# Altium PCB modulo_temperaturaUmidade.PcbDoc
Units mil, origin at the board's own origin, x right, y up, seen from the top; angles counter-clockwise.
Board outline 6000 x 4000 mil, 2 copper layers (Top Layer, Bottom Layer); 55 components, 34 nets, 205 pads, 0 vias.
Unrouted connection lines stored in the file: 149.
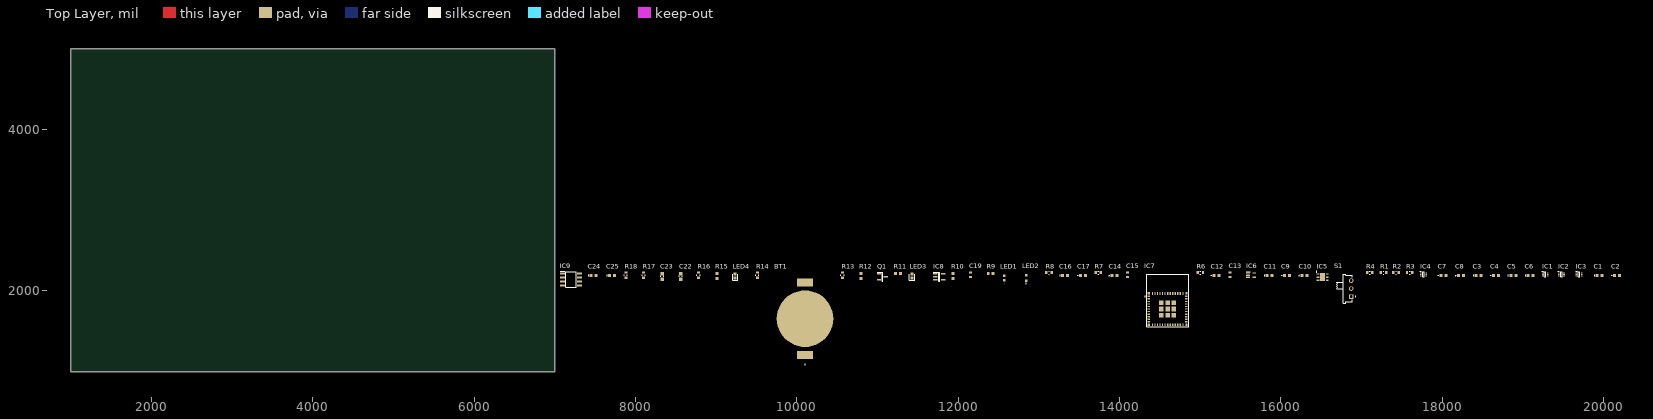
[diagram p0: Top Layer view]
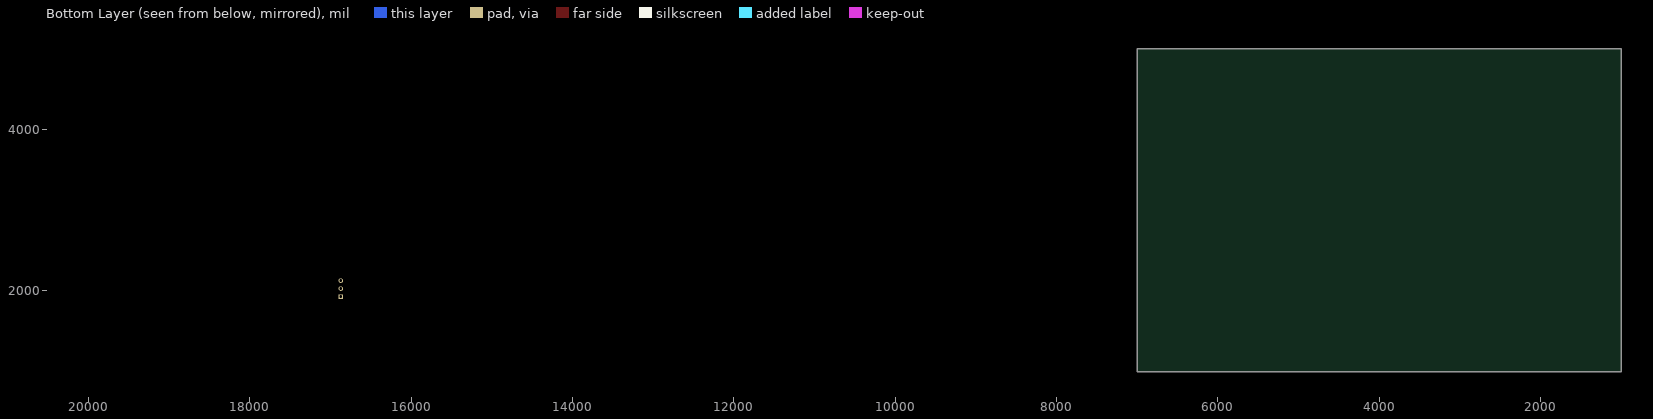
[diagram p1: Bottom Layer view, seen from below]

## Layer stack, top to bottom
Top Solder: solder mask 0.4, Solder Resist, Dk 3.5
Top Layer: signal copper 1.4
Dielectric 1: dielectric 12.6, FR-4, Dk 4.8
Bottom Layer: signal copper 1.4
Bottom Solder: solder mask 0.4, Solder Resist, Dk 3.5

## Board outline
1000,1000 7000,1000 7000,5000 1000,5000

## Design rules (kind name [scope] priority, off if disabled: settings)
Clearance [All] p1: gap=10 ignorepadtopadclearanceinfootprint=FALSE except(0: Arc-Hole Track-Hole SMDPad-Hole THPad-Hole Via-Hole Fill-Hole Poly-Hole Region-Hole Text-Hole)
PolygonConnect [All] p1: connectstyle=Relief reliefconductorwidth=10 reliefentries=4 polygonreliefangle="90 Angle" airgapwidth=10
RoutingVias [All] p1: holewidth=28 width=50 viastyle="Through Hole" minholewidth=28 minwidth=50 maxholewidth=28 maxwidth=50
SolderMaskExpansion [All] p1: expansion=4 istentingtop=FALSE
Width [All] p1: maxlimit=10 minlimit=10 preferedwidth=10
30 further rules are at their usual default settings.

## Components (designator, comment, footprint, x,y, rotation, side; value= is the part's Value field where it differs from the comment)
BT1 "BAT-HLD-001" BATHLD001 10100,1655 r90 top
C1 "C0603C104K4RACTU" C0603 19950,2190 r0 top value=0.1µ
C2 "C0603C103K4RECTU" C0603 20165,2190 r0 top value=0.01µ
C3 "C0603C104K4RACTU" C0603 18450,2190 r0 top value=0.1µ
C4 "C0603C103K4RECTU" C0603 18665,2190 r0 top value=0.01µ
C5 "C0603C104K4RACTU" C0603 18880,2190 r0 top value=0.1µ
C6 "C0603C103K4RECTU" C0603 19095,2190 r0 top value=0.01µ
C7 "C0603C104K4RACTU" C0603 18015,2190 r0 top value=0.1µ
C8 "C0603C103K4RECTU" C0603 18230,2190 r0 top value=0.01µ
C9 "C0603C104K4RACTU" C0603 16075,2190 r0 top value=0.1µ
C10 "C0603C103K4RECTU" C0603 16290,2190 r0 top value=0.01µ
C11 "C0603C103K4RECTU" C0603 15860,2190 r0 top value=0.01µ
C12 "C0603C104K4RACTU" C0603 15200,2190 r0 top value=0.1µ
C13 "CL10B105KO8NNNC" CAPC1608X90N 15365,2200 r90 top value=1µ
C14 "C0603C104K4RACTU" C0603 13935,2190 r0 top value=0.1µ
C15 "CL10B105KO8NNNC" CAPC1608X90N 14100,2200 r90 top value=1µ
C16 "C0603C103K4RECTU" C0603 13325,2190 r0 top value=0.01µ
C17 "C0603C104K4RACTU" C0603 13545,2190 r0 top value=0.1µ
C19 "CL10B105KO8NNNC" CAPC1608X90N 12150,2200 r90 top value=1µ
C22 "CC0603JRNPO9BN250" CAPC1608X90 8560,2180 r90 top value=25p
C23 "CC0603JRNPO9BN250" CAPC1608X90 8330,2180 r90 top value=25p
C24 "C0603C103K4RECTU" C0603 7480,2190 r0 top value=0.01µ
C25 "C0603C104K4RACTU" C0603 7710,2190 r0 top value=0.1µ
IC1 "TMP112AIDRLR" SOTFL50P160X60-6N 19275,2205 r0 top
IC2 "TMP112AIDRLR" SOTFL50P160X60-6N 19475,2205 r0 top
IC3 "TMP112AIDRLR" SOTFL50P160X60-6N 19695,2205 r0 top
IC4 "TMP112AIDRLR" SOTFL50P160X60-6N 17765,2205 r0 top
IC5 "HDC1080DMBR" SON100P300X300X80-7N-D 16515,2170 r0 top
IC6 "TPS71733DCKR" SOT65P210X110-5N 15630,2195 r0 top
IC7 "ESP32-C3-MINI-1-N4" ESP32C3MINI1N4 14595,1775 r0 top
IC8 "MCP73831T-2ACI_OT" SOT95P270X145-5N 11765,2175 r0 top value=MCP73831T-2ACI/OT
IC9 "ST25DV04K-IER6S3" SOIC127P600X175-8N 7200,2140 r0 top
LED1 "LY_L29K-H1K2-26" LYL29KH1K226 12570,2160 r90 top value="LY L29K-H1K2-26"
LED2 "CSL1001BT1C" CSL1001BT1C 12840,2160 r0 top
LED3 "LG_L29K-F2J1-24" LEDC1308X67N 11425,2185 r90 top value="LG L29K-F2J1-24"
LED4 "LS_L29K-G1H2-1" LEDC1308X67N 9235,2185 r90 top value="LS L29K-G1H2-1"
Q1 "SQ2364EES-T1_GE3" SOT95P237X112-3N 11060,2175 r0 top
R1 "RR0816P-512-D" RESC1608X60N 17270,2225 r0 top value=5.1K
R2 "RR0816P-512-D" RESC1608X60N 17425,2225 r0 top value=5.1K
R3 "RR0816P-512-D" RESC1608X60N 17595,2225 r0 top value=5.1K
R4 "RR0816P-512-D" RESC1608X60N 17100,2225 r0 top value=5.1K
R6 "RR0816P-512-D" RESC1608X60N 15000,2225 r0 top value=5.1K
R7 "RR0816P-103-D" RESC1608X60N 13735,2225 r0 top value=10K
R8 "RR0816P-512-D" RESC1608X60N 13125,2225 r0 top value=5.1K
R9 "RR0816P-162-D" RESC1608X50N#1 12400,2215 r0 top value=1.6K
R10 "RR0816P-2490-D-39A" RESC1608X50N#2 11935,2185 r90 top value=249
R11 "RR0816P-8060-D-88A" RESC1608X50N#2 11250,2215 r0 top value=806
R12 "RR0816P-2492-D-39C" RESC1608X50N#2 10795,2185 r90 top value=24.9K
R13 "RR0816P-331-D" RESC1608X60N 10565,2195 r90 top value=330
R14 "RR0816P-103-D" RESC1608X60N 9510,2195 r90 top value=10K
R15 "RR0816P-751-D" RESC1608X50N#2 9010,2185 r90 top value=750
R16 "RR0816P-103-D" RESC1608X60N 8780,2195 r90 top value=10K
R17 "RR0816P-512-D" RESC1608X60N 8100,2195 r90 top value=5.1K
R18 "RR0816P-512-D" RESC1608X60N 7880,2195 r90 top value=5.1K
S1 "SLW-913535-2A-RA-D" SLW9135352ARAD 16870,1930 r90 top

## Footprints (in the part's own frame and the unit in brackets; to place one, negate y for a bottom-side part, rotate by r counter-clockwise, add the part's x,y. Pads: shape width x height; smd on the part's side, far side on the other; paste and mask are expansions set on the pad)
BATHLD001 [mm]
  rect 2.5x5.1 smd: 1(-11.45,0) 2(11.45,0)
  round 17.8 smd: 3(0,0)
  silkscreen extent -14.5,-0.05 -14.4,0.05, body extent -11.43,-7.75 11.43,7.74, height 4.32
C0603 [mm]
  rect 0.95x1 smd: 1(-0.8,0) 2(0.8,0)
  silkscreen extent -1.7,-0.05 -1.6,0.05, body extent -0.87,-0.48 0.88,0.47, height 0.87
CAPC1608X90 [mm]
  rect 1.1x1 smd: 1(-0.85,0) 2(0.85,0)
  silkscreen extent -0.15,-0.45 0.15,0.45, body extent -0.8,-0.4 0.8,0.4, height 0.9
CAPC1608X90N [mm]
  rect 0.73x0.94 smd: 1(-0.71,0) 2(0.71,0)
  body extent -0.8,-0.4 0.8,0.4, height 0.9
CSL1001BT1C [mm]
  rect 0.8x0.8 smd: 1(0,-0.825) 2(0,0.825)
  silkscreen extent -0.05,-1.8 0.05,-1.7, body extent -0.4,-0.8 0.4,0.8, height 1.26
ESP32C3MINI1N4 [mm]
  rect 0.8x0.4 smd: 1(-5.9,4) 2(-5.9,3.2) 3(-5.9,2.4) 4(-5.9,1.6) 5(-5.9,0.8) 6(-5.9,0) 7(-5.9,-0.8) 8(-5.9,-1.6) 9(-5.9,-2.4) 10(-5.9,-3.2) 11(-5.9,-4) 25(5.9,-4) 26(5.9,-3.2) 27(5.9,-2.4) 28(5.9,-1.6) 29(5.9,-0.8) 30(5.9,0) 31(5.9,0.8) 32(5.9,1.6) 33(5.9,2.4) 34(5.9,3.2) 35(5.9,4)
  rect 0.4x0.8 smd: 12(-4.8,-4.9) 13(-4,-4.9) 14(-3.2,-4.9) 15(-2.4,-4.9) 16(-1.6,-4.9) 17(-0.8,-4.9) 18(0,-4.9) 19(0.8,-4.9) 20(1.6,-4.9) 21(2.4,-4.9) 22(3.2,-4.9) 23(4,-4.9) 24(4.8,-4.9) 36(4.8,4.9) 37(4,4.9) 38(3.2,4.9) 39(2.4,4.9) 40(1.6,4.9) 41(0.8,4.9) 42(0,4.9) 43(-0.8,4.9) 44(-1.6,4.9) 45(-2.4,4.9) 46(-3.2,4.9) 47(-4,4.9) 48(-4.8,4.9)
  rect 1.45x1.45 smd: 49(0,0) 50(1.975,1.975) 51(0,1.975) 52(-1.975,1.975) 53(-1.975,0) 54(-1.975,-1.975) 55(0,-1.975) 56(1.975,-1.975) 57(1.975,0)
  rect 0.7x0.7 smd: 58(-5.95,4.95) 59(-5.95,-4.95) 60(5.95,-4.95) 61(5.95,4.95)
  silkscreen extent -7.2,-5.6 6.6,11, body extent -6.6,-5.6 6.6,11, height 2.4
LEDC1308X67N [mm]
  rect 1x0.95 smd: 1(-0.6,0) 2(0.6,0)
  silkscreen extent -1.43,-0.85 0.6,0.85, body extent -0.88,-0.4 0.82,0.4, height 0.65
LYL29KH1K226 [mm]
  rect 0.8x0.8 smd: 1(-0.75,0) 2(0.75,0)
  silkscreen extent -1.7,-0.05 -1.6,0.05, body extent -0.65,-0.4 0.65,0.4, height 0.77
RESC1608X50N#1 [mm]
  rect 0.85x1 smd: 1(-0.75,0) 2(0.75,0)
  body extent -0.77,-0.43 0.78,0.42, height 0.45
RESC1608X50N#2 [mm]
  rect 0.94x1.02 smd: 1(-0.79,0) 2(0.79,0)
RESC1608X60N [mil]
  rect 30x37 smd: 1(-33,0) 2(33,0)
  silkscreen extent -5,-19 5,19, body extent -31,-16 31,16, height 16
SLW9135352ARAD [mm]
  rect 1.4x1.4 hole 0.9: 1(0,0)
  round 1.4 hole 0.9: 2(2.5,0) 3(5,0)
  silkscreen extent -2.05,-1.4 7.05,4.55, body extent -4.55,-3.3 4.55,2, height 1.83
SOIC127P600X175-8N [mm]
  rect 1.525x0.65 smd: 1(-2.712,1.905) 2(-2.712,0.635) 3(-2.712,-0.635) 4(-2.712,-1.905) 5(2.712,-1.905) 6(2.712,-0.635) 7(2.712,0.635) 8(2.712,1.905)
  silkscreen extent -3.47,-2.45 1.6,2.58, body extent -3,-2.45 3,2.45, height 1.75
SON100P300X300X80-7N-D [mm]
  rect 0.85x0.45 smd: 1(-1.45,1) 2(-1.45,0) 3(-1.45,-1) 4(1.45,-1) 5(1.45,0) 6(1.45,1)
  rect 1.6x2.5 smd: 7(0,0)
  silkscreen extent -2,1.6 -1.75,1.85, body extent -1.55,-1.5 1.55,1.5, height 0.8
SOT65P210X110-5N [mm]
  rect 1.2x0.4 smd: 1(-0.95,0.65) 2(-0.95,0) 3(-0.95,-0.65) 4(0.95,-0.65) 5(0.95,0.65)
  silkscreen extent -1.55,1.1 -0.35,1.1, body extent -1.05,-1 1.05,1, height 1
SOT95P237X112-3N [mm]
  rect 1.3x0.6 smd: 1(-1.05,0.95) 2(-1.05,-0.95) 3(1.05,0)
  silkscreen extent -1.7,-1.46 0.05,1.5, body extent -1.18,-1.46 1.18,1.46, height 1.12
SOT95P270X145-5N [mm]
  rect 1.4x0.6 smd: 1(-1.25,0.95) 2(-1.25,0) 3(-1.25,-0.95) 4(1.25,-0.95) 5(1.25,0.95)
  silkscreen extent -1.95,-1.45 0.2,1.5, body extent -1.35,-1.45 1.35,1.45, height 1.45
SOTFL50P160X60-6N [mm]
  rect 0.475x0.3 smd: 1(-0.838,0.5) 2(-0.838,0) 3(-0.838,-0.5) 4(0.838,-0.5) 5(0.838,0) 6(0.838,0.5)
  silkscreen extent -1.07,-0.8 0.25,0.9, body extent -0.8,-0.8 0.8,0.8, height 0.6

## Part data
BT1: "Coin Cell Battery Holders Linx CR2032 Battery Holder", Arrow Part Number=BAT-HLD-001, MPN=BAT-HLD-001, PCBA=Assembly, Supplier=Mouser
C1 C3 C5 C7 C9 C12 C14 C17 C25: "Multilayer Ceramic Capacitors MLCC - SMD/SMT 16V 0.1uF X7R 0603 10% baixa ESR", Manufacturer_Name=KEMET, Mouser Part Number=80-C0603C104K4R, Arrow Part Number=C0603C104K4RACTU, Arrow Price/Stock=https://www.arrow.com/en/products/c0603c104k4ractu/kemet-corporation?utm_currency=USD&region=nac, Datasheet Link=https://content.kemet.com/datasheets/KEM_C1002_X7R_SMD.pdf, Height=0.87mm, Manufacturer_Part_Number=C0603C104K4RACTU, Mouser Price/Stock=https://www.mouser.co.uk/ProductDetail/KEMET/C0603C104K4RACTU?qs=l5k%252BbMnNDknCtKnMv1oEgA%3D%3D, MPN=C0603C104K4RACTU, PCBA=Assembly, Supplier=Mouser
C2 C4 C6 C8 C10 C11 C16 C24: "Multilayer Ceramic Capacitors MLCC - SMD/SMT 16V 0.01uF X7R 0603 10% baixa ESR", Manufacturer_Name=KEMET, Mouser Part Number=80-C0603C103K4RECTU, Arrow Part Number=C0603C103K4RECTU, Arrow Price/Stock=https://www.arrow.com/en/products/c0603c103k4rectu/kemet-corporation?region=nac, Datasheet Link=https://content.kemet.com/datasheets/KEM_C1090_X7R_ESD.pdf, Height=0.87mm, Manufacturer_Part_Number=C0603C103K4RECTU, Mouser Price/Stock=https://www.mouser.co.uk/ProductDetail/KEMET/C0603C103K4RECTU?qs=55YtniHzbhDzGaFFpCm8vg%3D%3D, MPN=C0603C103K4RECTU, PCBA=Assembly, Supplier=Mouser
C13 C15 C19: "Capacitor cerâmico de baixa ESR Multilayer Ceramic Capacitors MLCC - SMD/SMT 1uF+/-10% 16V X7R 16 0603", Manufacturer_Name=SAMSUNG, Mouser Part Number=187-CL10B105KO8NNNC, Arrow Part Number=CL10B105KO8NNNC, Arrow Price/Stock=https://www.arrow.com/en/products/cl10b105ko8nnnc/samsung-electro-mechanics?utm_currency=USD&region=europe, Datasheet Link=https://datasheet.datasheetarchive.com/originals/distributors/Datasheets-DGA10/2410179.pdf, Height=0.9mm, Manufacturer_Part_Number=CL10B105KO8NNNC, Mouser Price/Stock=https://www.mouser.co.uk/ProductDetail/Samsung-Electro-Mechanics/CL10B105KO8NNNC?qs=349EhDEZ59o2mlUAs%2FkaKg%3D%3D, MPN=CL10B105KO8NNNC, PCBA=Assembly, Supplier=Mouser
C22 C23: "25 pF Â±5% 50V Ceramic Capacitor C0G, NP0 0603 (1608 Metric) MLCC SMD/SMT", Package="0603 Yageo", Check_prices=https://www.snapeda.com/parts/CC0603JRNPO9BN250/Yageo/view-part/?ref=eda, MF=Yageo, MP=CC0603JRNPO9BN250, MPN=CC0603JRNPO9BN250, PCBA=Assembly, SnapEDA_Link=https://www.snapeda.com/parts/CC0603JRNPO9BN250/Yageo/view-part/?ref=snap, Supplier=Mouser
IC1 IC2 IC3 IC4: "Board Mount Temperature Sensors Hi-Prec Lo-Pwr Dig T emp Sensor A 595-TMP112AIDRLT", Arrow Part Number=TMP112AIDRLR, MPN=TMP112AIDRLR, PCBA=Assembly, Supplier=Mouser
IC5: "Board Mount Humidity Sensors 2% RH low-power digital relative humidit A 595-HDC1080DMBT", Arrow Part Number=HDC1080DMBR, MPN=HDC1080DMBR, PCBA=Assembly, Supplier=Mouser
IC6: "LDO Voltage Regulators Sgl Output LDO 150mA Fixed(3.3V) Hi PSRR A 595-TPS71733DCKT", Arrow Part Number=TPS71733DCKR, MPN=TPS71733DCKR, PCBA=Assembly, Supplier=Mouser
IC7: "Multiprotocol Modules SMD module, ESP32-C3FN4, PCB antenna, -40C - +85C", MPN=ESP32-C3-MINI-1-N4, PCBA=Assembly, Supplier=Mouser
IC8: "Battery Management Charge mgnt contr", Arrow Part Number=MCP73831T-2ACI/OT, MPN=MCP73831T-2ACI/OT, PCBA=Assembly, Supplier=Mouser
IC9: "NFC/RFID Tags & Transponders Dynamic NFC/RFID tag IC 4-Kbit EEPROM, and fast transfer mode capability", Arrow Part Number=ST25DV04K-IER6S3, MPN=ST25DV04K-IER6S3, PCBA=Assembly, Supplier=Mouser
LED1: "Single Color LEDs Smartled VIS Yellow 0603 587 nm 20 mA 2.2 V 3.6 mW", Arrow Part Number="LY L29K-H1K2-26", Manufacturer_Name="ams OSRAM", Mouser Part Number=720-LYL29KH1K226Z, Arrow Price/Stock=https://www.arrow.com/en/products/ly-l29k-h1k2-26/osram-opto-semiconductors?region=nac, Datasheet Link=https://dammedia.osram.info/media/resource/hires/osram-dam-5662688/LY%20L29K_EN.pdf, Height=0.67mm, Manufacturer_Part_Number="LY L29K-H1K2-26", Mouser Price/Stock=https://www.mouser.co.uk/ProductDetail/ams-OSRAM/LY-L29K-H1K2-26?qs=NTcu%252BMSV%252BkOdHd4qoSi5WQ%3D%3D, MPN="LY L29K-H1K2-26", PCBA=Assembly, Supplier=Mouser
LED2: "Single Color LEDs LOW CURRENT BLUE SMD LED 0603 468 nm 1 mA  2.8 V 33 mW", Manufacturer_Name="ROHM Semiconductor", Mouser Part Number=755-CSL1001BT1C, Datasheet Link=https://fscdn.rohm.com/en/products/databook/datasheet/opto/led/chip_mono/csl1001bt1(c)-e.pdf, Height=1.16mm, Manufacturer_Part_Number=CSL1001BT1C, Mouser Price/Stock=https://www.mouser.co.uk/ProductDetail/ROHM-Semiconductor/CSL1001BT1C?qs=HoCaDK9Nz5fqNTX3Pg0ReA%3D%3D, MPN=CSL1001BT1C, PCBA=Assembly, Supplier=Mouser
LED3: "Single Color LEDs Green, 570nm 1.4-5.6mcd, 2mA 0603 2.2 V 3.4 mW", Arrow Part Number="LG L29K-F2J1-24", Manufacturer_Name="ams OSRAM", Mouser Part Number=720-LGL29KF2J124Z, Arrow Price/Stock=https://www.arrow.com/en/products/lg-l29k-f2j1-24/ams-osram?utm_currency=USD&region=europe, Datasheet Link=http://www.osram-os.com/Graphics/XPic0/00167682_0.pdf, Height=0.67mm, Manufacturer_Part_Number="LG L29K-F2J1-24", Mouser Price/Stock=https://www.mouser.co.uk/ProductDetail/ams-OSRAM/LG-L29K-F2J1-24?qs=fnYUjNMxfVByrkxdJaMWtQ%3D%3D, MPN="LG L29K-F2J1-24", PCBA=Assembly, Supplier=Mouser
LED4: "Single Color LEDs Super Red, 630nm 13mcd, 2mA 0603 2.2 V 3.6 mW", Arrow Part Number="LS L29K-G1H2-1", Manufacturer_Name="ams OSRAM", Mouser Part Number=720-LSL29K-G1H2-1-Z, Arrow Price/Stock=https://www.arrow.com/en/products/ls-l29k-g1h2-1/osram-opto-semiconductors, Datasheet Link=https://dammedia.osram.info/media/resource/hires/osram-dam-5662679/LS%20L29K_EN.pdf, Height=0.67mm, Manufacturer_Part_Number="LS L29K-G1H2-1", Mouser Price/Stock=https://www.mouser.co.uk/ProductDetail/ams-OSRAM/LS-L29K-G1H2-1?qs=%252BEew9%252B0nqrDH0GMMtFi6lA%3D%3D, MPN="LS L29K-G1H2-1", PCBA=Assembly, Supplier=Mouser
Q1: "MOSFETs 60V Vds; +/-8V Vgs SOT-23; 4A Id", Arrow Part Number=SQ2364EES-T1_GE3, MPN=SQ2364EES-T1_GE3, PCBA=Assembly, Supplier=Mouser
R1 R2 R3 R4 R6 R8 R17 R18: "Thin Film Resistors - SMD 1/16W 5.1Kohm 0.5% 25ppm", Manufacturer_Name=Susumu, Mouser Part Number=754-RR0816P-512D, Datasheet Link=http://componentsearchengine.com/Datasheets/1/RR0816P-512-D.pdf, Manufacturer_Part_Number=RR0816P-512-D, Mouser Price/Stock=https://www.mouser.co.uk/ProductDetail/Susumu/RR0816P-512-D?qs=nCAm%252BcMdy9ypjTUx7cPUNg%3D%3D, MPN=RR0816P-512-D, PCBA=Assembly, Supplier=Mouser
R7 R14 R16: "Thin Film Resistors - SMD 1/16W 10Kohm 0.5% 25ppm", Manufacturer_Name=Susumu, Mouser Part Number=754-RR0816P-103D, Arrow Part Number=RR0816P-103-D, Arrow Price/Stock=https://www.arrow.com/en/products/rr0816p-103-d/susumu, Datasheet Link=http://componentsearchengine.com/Datasheets/1/RR0816P-103-D.pdf, Manufacturer_Part_Number=RR0816P-103-D, Mouser Price/Stock=https://www.mouser.co.uk/ProductDetail/Susumu/RR0816P-103-D?qs=nCAm%252BcMdy9zJFUifGf2vtQ%3D%3D, MPN=RR0816P-103-D, PCBA=Assembly, Supplier=Mouser
R9: "Thin Film Resistors - SMD 1/16W 1.6Kohm 0.5% 25ppm", Manufacturer_Name=Susumu, Datasheet Link=http://www.susumu.co.jp/common/pdf/n_catalog_partition05_en.pdf, Height=0.5mm, Manufacturer_Part_Number=RR0816P-162-D, MPN=RR0816P-162-D, PCBA=Assembly, Supplier=Mouser
R10: "RES SMD 249 OHM 0.5% 1/16W 0603 Thin Film Resistors 25ppm", Package=None, Availability=Unavailable, MP=RR0816P-2490-D-39A, MPN=RR0816P-2490-D-39A, PCBA=Assembly, Price=None, Supplier=Mouser
R11: "806 Ohms Â±0.5% 0.063W, 1/16W Chip Resistor 0603 (1608 Metric) - Thin Film SMD 25ppm", Package="1608 Susumu", Check_prices=https://www.snapeda.com/parts/RR0816P-8060-D-88A/Susumu/view-part/?ref=eda, MF=Susumu, MP=RR0816P-8060-D-88A, MPN=RR0816P-8060-D-88A, PCBA=Assembly, SnapEDA_Link=https://www.snapeda.com/parts/RR0816P-8060-D-88A/Susumu/view-part/?ref=snap, Supplier=Mouser
R12: "24.9 kOhms Â±0.5% 0.063W, 1/16W Chip Resistor 0603 (1608 Metric) - Thin Film SMD 25ppm", Package="1608 Susumu", Check_prices=https://www.snapeda.com/parts/RR0816P-2492-D-39C/Susumu/view-part/?ref=eda, MF=Susumu, MP=RR0816P-2492-D-39C, MPN=RR0816P-2492-D-39C, PCBA=Assembly, SnapEDA_Link=https://www.snapeda.com/parts/RR0816P-2492-D-39C/Susumu/view-part/?ref=snap, Supplier=Mouser
R13: "Thin Film Resistors - SMD 1/16W 330ohm 0.5% 25ppm", Manufacturer_Name=Susumu, Mouser Part Number=754-RR0816P-331D, Manufacturer_Part_Number=RR0816P-331-D, Mouser Price/Stock=https://www.mouser.com/Search/Refine.aspx?Keyword=754-RR0816P-331D, MPN=RR0816P-331-D, PCBA=Assembly, Supplier=Mouser
R15: "Res Thin Film 0603 750 Ohm 0.5% 0.063W(1/16W) Â±25ppm/Â°C Pad SMD Automotive T/R", Package="1608 Susumu", Check_prices=https://www.snapeda.com/parts/RR0816P-751-D/Susumu/view-part/?ref=eda, MF=Susumu, MP=RR0816P-751-D, MPN=RR0816P-751-D, PCBA=Assembly, SnapEDA_Link=https://www.snapeda.com/parts/RR0816P-751-D/Susumu/view-part/?ref=snap, Supplier=Mouser
S1: "Slide Switches 9.1 x 3.5 x 3.5 mm, 2 mm Raised Slide Actuator, Right-Angle, Through Hole", Arrow Part Number=SLW-913535-2A-RA-D, MPN=SLW-913535-2A-RA-D, PCBA=Assembly, Supplier=Mouser

## Nets (pads, with @x,y where several pads share a name; then routed paths per layer and width w, separated by ;. In a path a pad name is that pad's centre, name@x,y a point inside that pad or via, vN(x,y) a via of type N, cw(c..) or ccw(c..) an arc to the next point about the centre after c; other vN are vias at no path point)
+3.3V: C1.1 C2.1 C3.1 C4.1 C5.1 C6.1 C7.1 C8.1 C9.2 C10.2 C16.2 C17.2 C24.1 C25.1 IC1.5 IC2.5 IC3.5 IC4.4 IC4.5 IC5.5 IC7.3 IC9.8 R1.1 R2.1 R3.1 R4.1 R6.2 R7.2 R8.2
+5V: IC8.4 R9.1
GND: BT1.3 C1.2 C2.2 C3.2 C4.2 C5.2 C6.2 C7.2 C8.2 C9.1 C10.1 C11.2 C12.1 C13.1 C14.1 C15.1 C16.1 C17.1 C19.1 C22.1 C23.2 C24.2 C25.2 IC1.2 IC1.4 IC2.2 IC3.2 IC4.2 IC5.2 IC6.2 IC7.1 IC7.2 IC7.11 IC7.14 IC7.36 IC7.37 IC7.38 IC7.39 IC7.40 IC7.41 IC7.42 IC7.43 IC7.44 IC7.45 IC7.46 IC7.47 IC7.48 IC7.49 IC7.50 IC7.51 IC7.52 IC7.53 IC7.54 IC7.55 IC7.56 IC7.57 IC7.58 IC7.59 IC7.60 IC7.61 IC8.2 IC9.4 LED2.1 LED3.1 LED4.1 R12.1 R16.1 R17.1 R18.1
NetA1_1: IC9.2
NetA1_2: IC9.3
NetBT1_1: BT1.1 IC8.3 Q1.3 S1.2
NetC11_1: C11.1 IC6.4
NetC12_2: C12.2 C13.2 IC6.1 IC6.3 S1.3
NetC14_2: C14.2 C15.2 IC6.5
NetC19_2: C19.2 IC7.8 R7.1
NetC22_2: C22.2 IC7.26
NetC23_1: C23.1 IC7.27
NetIC1_1: IC1.1 IC2.1 IC2.4 IC3.1 IC4.1 IC5.6 IC7.5 IC9.6 R6.1
NetIC1_3: IC1.3 IC7.20 R1.2
NetIC1_6: IC1.6 IC2.6 IC3.4 IC3.6 IC4.6 IC5.1 IC7.6 IC9.5 R8.1
NetIC2_3: IC2.3 IC7.22 R2.2
NetIC3_3: IC3.3 IC7.23 R3.2
NetIC4_3: IC4.3 IC7.21 R4.2
NetIC7_12: IC7.12 R10.2
NetIC7_13: IC7.13 R11.2
NetIC7_16: IC7.16 R13.1
NetIC7_18: IC7.18 R14.1 R16.2
NetIC7_19: IC7.19 R15.2
NetIC8_1: IC8.1 LED1.1
NetIC8_5: IC8.5 R12.2
NetIC9_1: IC9.1
NetJ1_A5: R17.2
NetJ1_B5: R18.2
NetLED1_2: LED1.2 R9.2
NetLED2_2: LED2.2 R10.1
NetLED3_2: LED3.2 R11.1
NetLED4_2: LED4.2 R15.1
NetQ1_1: Q1.1 R13.2
NetQ1_2: Q1.2 R14.2
pads on no net: BT1.2 IC5.3 IC5.4 IC5.7 IC7.4 IC7.7 IC7.9 IC7.10 IC7.15 IC7.17 IC7.24 IC7.25 IC7.28 IC7.29 IC7.30 IC7.31 IC7.32 IC7.33 IC7.34 IC7.35 IC9.7 S1.1